# EAGLE board HomeAtion_RemoteDHT (EAGLE 7.5.0)
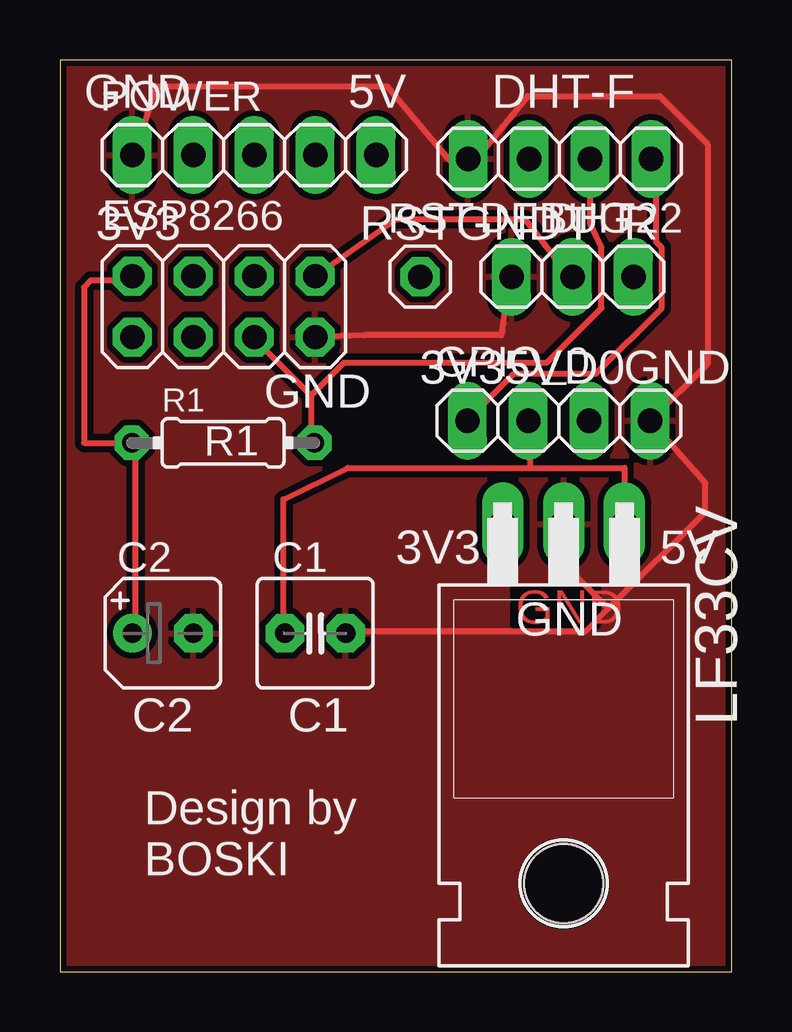
[diagram p0: board, top side]
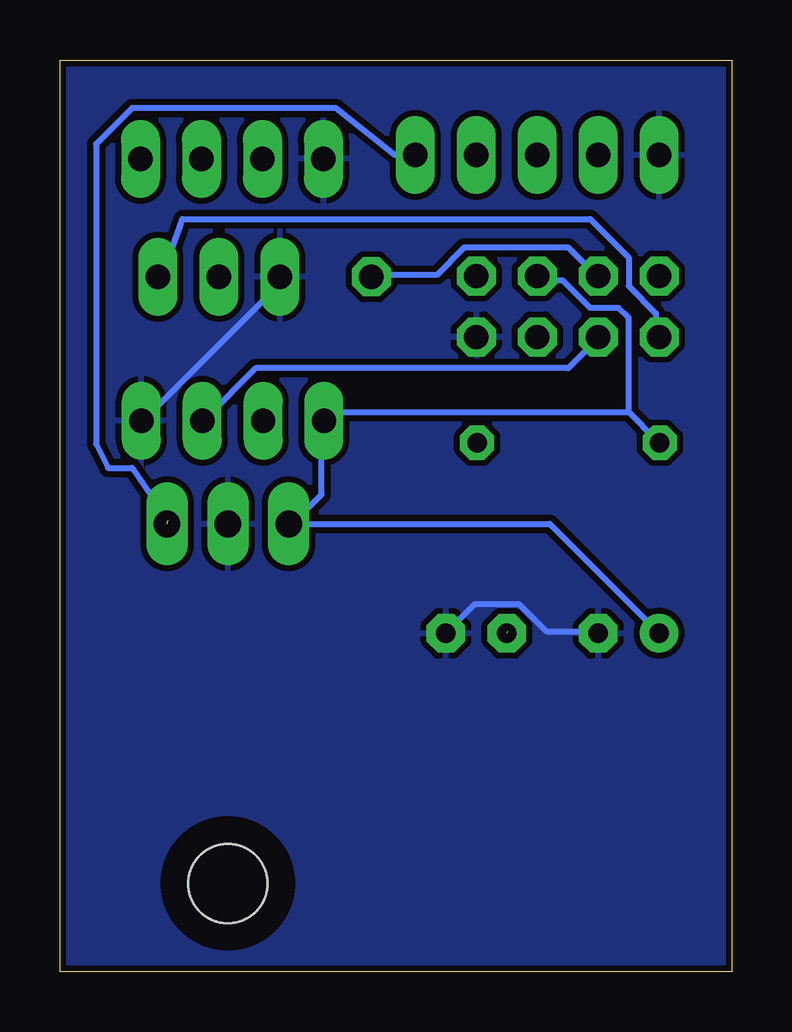
[diagram p1: board, bottom side, seen from below]

Size 28 x 38 mm. Coordinates in mm from the lower left corner, seen from the top.
Outline: 0,0 28,0 28,38 0,38 0,0
Copper layers (1*16): Top 0.035mm / dielectric 1.5mm / Bottom 0.035mm
Design rules "SparkFun": minimum track width 8mil, minimum drill 20mil, track to track 8mil, track to pad 8mil, pad to pad 8mil, via to via 8mil, smd to smd 8mil, copper to edge 8mil, drill to drill 8mil, minimum pad ring 12mil, minimum via ring 10mil, stop-mask expansion 4mil, vias tented up to drill 20mil, thermal gap 10mil

## Footprints (pad centres in the part's own frame; a part is rotated, then mirrored left to right if it is on the bottom)
C2.5-5 = drill 0.813 pad 1.6 octagon: 1 -1.27,0; 2 1.27,0
B45181A = drill 0.813 pad 1.6: + -1.27,0 | drill 0.813 pad 1.6 octagon: - 1.27,0
1X03 = drill 1.016 long: 1 -2.54,0; 2 0,0; 3 2.54,0
1X04 = drill 1.016 long: 1 -3.81,0; 2 -1.27,0; 3 1.27,0; 4 3.81,0
2X04 = drill 1.016 octagon: 1 -3.81,-1.27; 2 -3.81,1.27; 3 -1.27,-1.27; 4 -1.27,1.27; 5 1.27,-1.27; 6 1.27,1.27; 7 3.81,-1.27; 8 3.81,1.27
TO220H = drill 1.118 long: 1 -2.54,-10.16; 2 0,-10.16; 3 2.54,-10.16 | hole 3.302: 0,4.826
1X05 = drill 1.016 long: 1 -5.08,0; 2 -2.54,0; 3 0,0; 4 2.54,0; 5 5.08,0
0204/7 = drill 0.813 octagon: 1 -3.81,0; 2 3.81,0
1X01 = drill 1.016 octagon: 1 0,0

## Placement (x,y rotation side)
C1  100nF  [C2.5-5]  10.64,14.1 0 top
C2  10uF  [B45181A]  4.29,14.1 0 top
DEBUG  [1X03]  21.37,28.96 0 top
DHT22  [1X04]  20.83,33.88 180 top
ESP8266  [2X04]  6.83,27.72 0 top
GPIO_0  [1X04]  20.8,22.96 0 top
LF33CV  7805T  [TO220H]  21,8.5 180 top
POWER  [1X05]  8.1,34.04 0 top
R1  10K  [0204/7]  6.8,22.04 0 top
RST  [1X01]  15.02,28.96 0 top

## Library data of the parts
C1 = capacitor-wima
C2 R1 = rcl
DEBUG DHT22 ESP8266 GPIO_0 POWER RST = pinhead
LF33CV = linear

## Nets
+3V3: C2.+ DHT22.1 ESP8266.2 ESP8266.6 GPIO_0.1 LF33CV.3 R1.1
+5V: C1.1 GPIO_0.2 LF33CV.1 POWER.5
GND: C1.2 C2.- DEBUG.1 DHT22.4 ESP8266.7 GPIO_0.4 LF33CV.2 POWER.1
N$1: DEBUG.3 ESP8266.1
N$2: DEBUG.2 ESP8266.8
N$3: ESP8266.4 RST.1
N$5: DHT22.2 ESP8266.5 R1.2
N$7: ESP8266.3 GPIO_0.3

## Tracks (layer width: path | path; a pad name or v marks a point on that pad's centre or on a via)
+3V3
  Top 0.254: R1.1 3.15,21.95 3.15,14.18 C2.+ | 3.15,22.18 R1.1 | DHT22.1 24.86,33.84 24.86,30.41 25.09,30.18 25.09,27.66 22.35,24.92 18.92,24.92 17.09,23.09 GPIO_0.1 | ESP8266.2 3.02,28.81 1.29,28.81 1,28.52 1,22.04 R1.1
  Bottom 0.254: 4.29,23.32 4.29,27.25 4.7,27.66 5.89,27.66 7.03,28.81 7.95,28.81 ESP8266.6 | 4.29,23.32 3.15,22.18 R1.1 | 18.23,18.75 17.09,19.89 17.09,22.86 GPIO_0.1 16.86,23.09 16.63,23.32 4.29,23.32 | LF33CV.3 7.58,18.66 C2.+
+5V  (2 unrouted)
  Top 0.254: 19.61,21 19.61,22.86 GPIO_0.2 | 9.32,14.18 9.32,19.68 12,21 19.61,21 | 19.61,21 23.54,21 LF33CV.1
  Bottom 0.254: POWER.5 14.04,34.04 16.5,36 25,36 26.5,34.5 26.5,22 26,21 25,21 23.5,18.81
GND
  Top 0.254: DEBUG.1 18.69,28.81 18.41,26.52 12.69,26.52 ESP8266.7 10.46,26.52 | POWER.1 3.15,34.06 3.98,36.89 13.66,36.89 16.22,33.84 16.86,33.84 17.34,33.84 19.5,36.5 25,36.5 27,34.5 27,25.35 GPIO_0.4 26.91,20.36 26.91,19.16 22.87,15.13 | 22.87,15.13 21.92,14.18 12.06,14.18 C1.2 | LF33CV.2 21,17 22.87,15.13
  Bottom 0.254: C2.- 5.66,14.18 7.72,14.18 8.86,15.32 10.69,15.32 11.83,14.18 C1.2 | GPIO_0.4 24.41,23.09 18.69,28.81 DEBUG.1
  pour Top (isolate 0.254): 0,38 28,38 28,0 0,0
  pour Bottom (isolate 0.254): 0,38 28,38 28,0 0,0
N$1
  Bottom 0.254: ESP8266.1 3.15,26.52 3.15,27.44 4.29,28.58 4.29,29.77 5.89,31.37 22.89,31.37 23.72,29.04 DEBUG.3
N$2
  Top 0.254: DEBUG.2 21.21,29.04 19.38,31.37 14.02,31.37 10.69,29.04 ESP8266.8
N$3
  Bottom 0.254: RST.1 14.81,29.04 12.29,29.04 11.15,30.18 6.8,30.18 5.66,29.04 ESP8266.4
N$5
  Top 0.254: 10.46,24.01 10.46,22.18 R1.2 | 10.46,24.01 8.18,26.29 ESP8266.5 | 10.46,24.01 11.83,25.38 20.29,25.38 22.58,27.66 22.58,30.18 22.12,31.14 22.12,33.84 DHT22.2
N$7
  Bottom 0.254: GPIO_0.3 21.89,23.09 19.84,25.15 6.8,25.15 5.66,26.29 ESP8266.3

## Text on the board
Top: GND
tPlace: GND | 5V | DHT-F | 3V3 | RST | GND | T | R | GND | 3V3 | 5V | D0 | GND | R1 | 3V3 | 5V | GND | C2 | C1 | Design by / BOSKI